# EAGLE board USBHostModule (EAGLE 9.6.2)
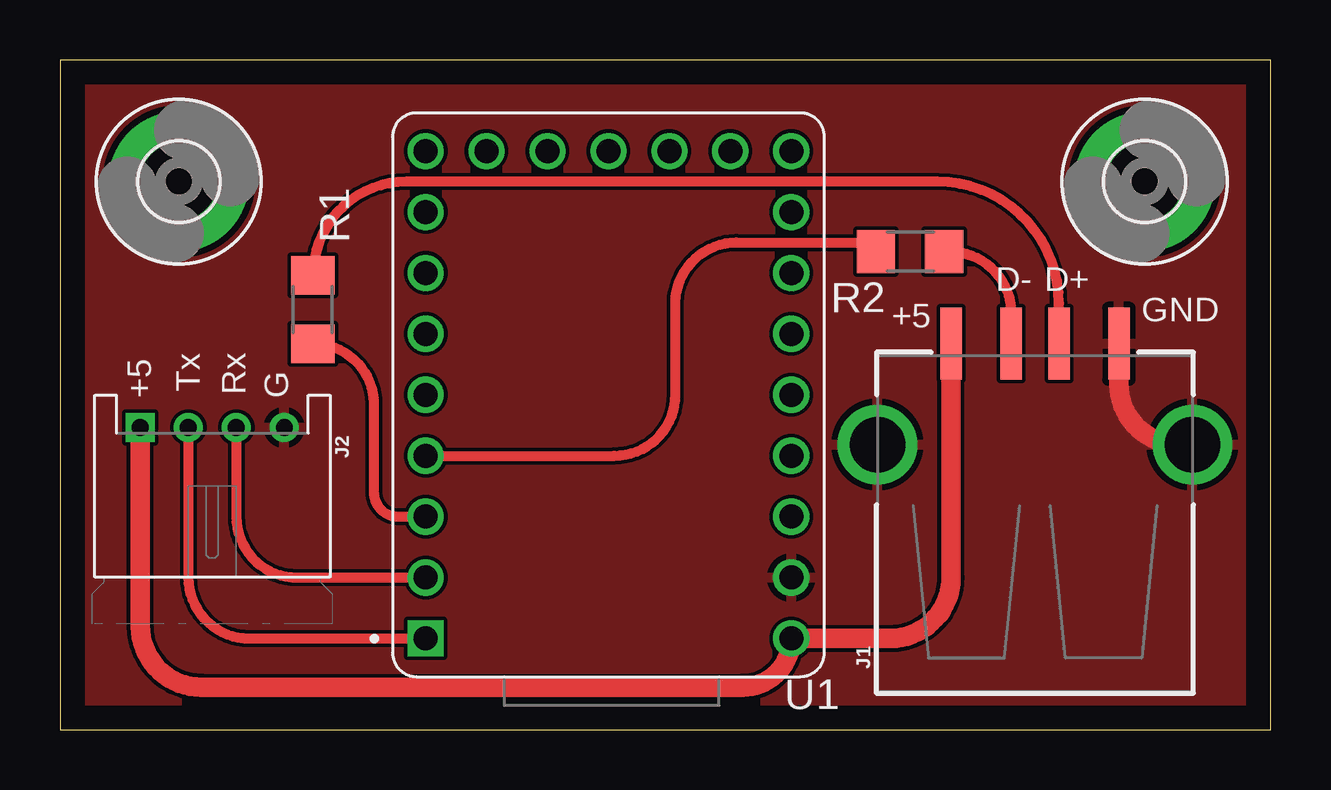
[diagram p0: board, top side]

Size 50.47 x 27.93 mm. Coordinates in mm from the lower left corner, seen from the top.
Outline: 0,0 50.47,0 50.47,27.93 0,27.93 0,0
Copper layers (1*16): Top 0.035mm / dielectric 1.5mm / Bottom 0.035mm
Design rules "default": minimum track width 6mil, minimum drill 0.35mm, track to track 6mil, track to pad 6mil, pad to pad 6mil, via to via 6mil, smd to smd 6mil, copper to edge 40mil, drill to drill 6mil, minimum pad ring 10mil, minimum via ring 8mil, stop-mask expansion 4mil, vias tented up to drill 0mil, thermal gap 10mil

## Footprints (pad centres in the part's own frame; a part is rotated, then mirrored left to right if it is on the bottom)
3,2-PAD = drill 3.2 pad 5.842: B3,2 0,0
USB-A-S-SILK-FEMALE = smd 3 x 0.9: D+ 7.212,-1; D- 7.212,1; GND 7.212,-3.5; VBUS 7.212,3.5 | drill 2.311: SHLD1 3,-6.566; SHLD2 3,6.566
S4B-PH-KL = drill 0.7 square: 1 3,-3.72 | drill 0.7: 2 1,-3.72; 3 -1,-3.72; 4 -3,-3.72
R1206 = smd 1.6 x 1.803: 1 -1.422,0; 2 1.422,0
MODULE_RP2040-ZERO = drill 1 square: 1 7.62,10.16 | drill 1: 2 7.62,7.62; 3 7.62,5.08; 4 7.62,2.54; 5 7.62,0; 6 7.62,-2.54; 7 7.62,-5.08; 8 7.62,-7.62; 9 7.62,-10.16; 10 5.08,-10.16; 11 2.54,-10.16; 12 0,-10.16; 13 -2.54,-10.16; 14 -5.08,-10.16; 15 -7.62,-10.16; 16 -7.62,-7.62; 17 -7.62,-5.08; 18 -7.62,-2.54; 19 -7.62,0; 20 -7.62,2.54; 21 -7.62,5.08; 22 -7.62,7.62; 23 -7.62,10.16

## Placement (x,y rotation side)
H1  MOUNT-PAD-ROUND3.2  [3,2-PAD]  45.21,22.86 0 top
H4  MOUNT-PAD-ROUND3.2  [3,2-PAD]  4.95,22.86 0 top
J1  USB_A_SMT_FEMALE  [USB-A-S-SILK-FEMALE]  40.64,8.89 90 top
J2  JST-PH-4_TH-RA  [S4B-PH-KL]  6.35,8.89 180 top
R1  22R  [R1206]  10.54,17.53 270 top
R2  22R  [R1206]  35.43,19.94 180 top
U1  RP2040-ZERO'  [MODULE_RP2040-ZERO]  22.86,13.97 180 top

## Library data of the parts
H1 H4 = holes
J1 = SparkFun-Connectors; PROD_ID: CONN-09520; SF_ID: PRT-09011
J2 = con-JST-PH; MF: JST; MPN: S4B-PH-KL
R1 R2 = adafruit
U1 = RP2040-ZERO; AVAILABILITY: Not in stock; CHECK_PRICES: https://www.snapeda.com/parts/RP2040-ZERO/Waveshare+Electronics/view-part/?ref=eda; DESCRIPTION: Low-Cost, High-Performance Pico-Like MCU Board Based On Raspberry Pi Microcontroller RP2040; MF: Waveshare Electronics; MP: RP2040-ZERO; PACKAGE: Package; PRICE: None; SNAPEDA_LINK: https://www.snapeda.com/parts/RP2040-ZERO/Waveshare+Electronics/view-part/?ref=snap

## Nets
3V3: U1.21
+5: J1.VBUS J2.1 U1.23
D+: J1.D+ R1.1
D-: J1.D- R2.1
GND: H1.B3,2 H4.B3,2 J1.GND J1.SHLD1 J1.SHLD2 J2.4 U1.22
N$5: R2.2 U1.4
N$6: R1.2 U1.3
RX: J2.3 U1.2
TX: J2.2 U1.1

## Tracks (layer width: path | path; a pad name or v marks a point on that pad's centre or on a via)
+5
  Top 0.813: J1.VBUS 37.14,6.35 arc-90 34.6,3.81 U1.23 arc-90 28.45,1.78 5.89,1.78 arc-90 3.35,4.32 J2.1
D+
  Top 0.406: J1.D+ 41.64,17.78 arc90 36.56,22.86 14.45,22.86 arc90 R1.1
D-
  Top 0.406: 39.64,16.24 J1.D- 39.64,17.4 arc90 37.1,19.94 R2.1
GND
  Top 0.406: 44.14,14.43 arc90 46.68,11.89
  Top 0.813: J1.GND 44.14,14.43 arc90 46.68,11.89 J1.SHLD1
  pour Top: 0,27.94 0,0 50.29,0 50.29,1.14 50.29,27.69 50.16,27.69 50.16,27.94
N$5
  Top 0.406: U1.4 23.11,11.43 arc90 25.65,13.97 25.65,17.78 arc-90 28.19,20.32 34.29,20.32 34.29,20.22 arc-90 R2.2
N$6
  Top 0.406: R1.2 arc-90 13.08,13.56 13.08,9.91 arc90 14.1,8.89 U1.3
RX
  Top 0.406: J2.3 7.35,8.89 arc90 9.89,6.35 U1.2
TX
  Top 0.406: J2.2 5.35,6.35 arc90 7.89,3.81 U1.1

## Text on the board
tNames: D- | D+ | +5 | GND | Tx | +5 | Rx | G